# Altium PCB LiPoBattery.PcbDoc
Units mil, origin at the board's own origin, x right, y up, seen from the top; angles counter-clockwise.
Board outline 2500 x 2500 mil, 2 copper layers (Top Layer, Bottom Layer); 22 components, 10 nets, 59 pads, 14 vias.
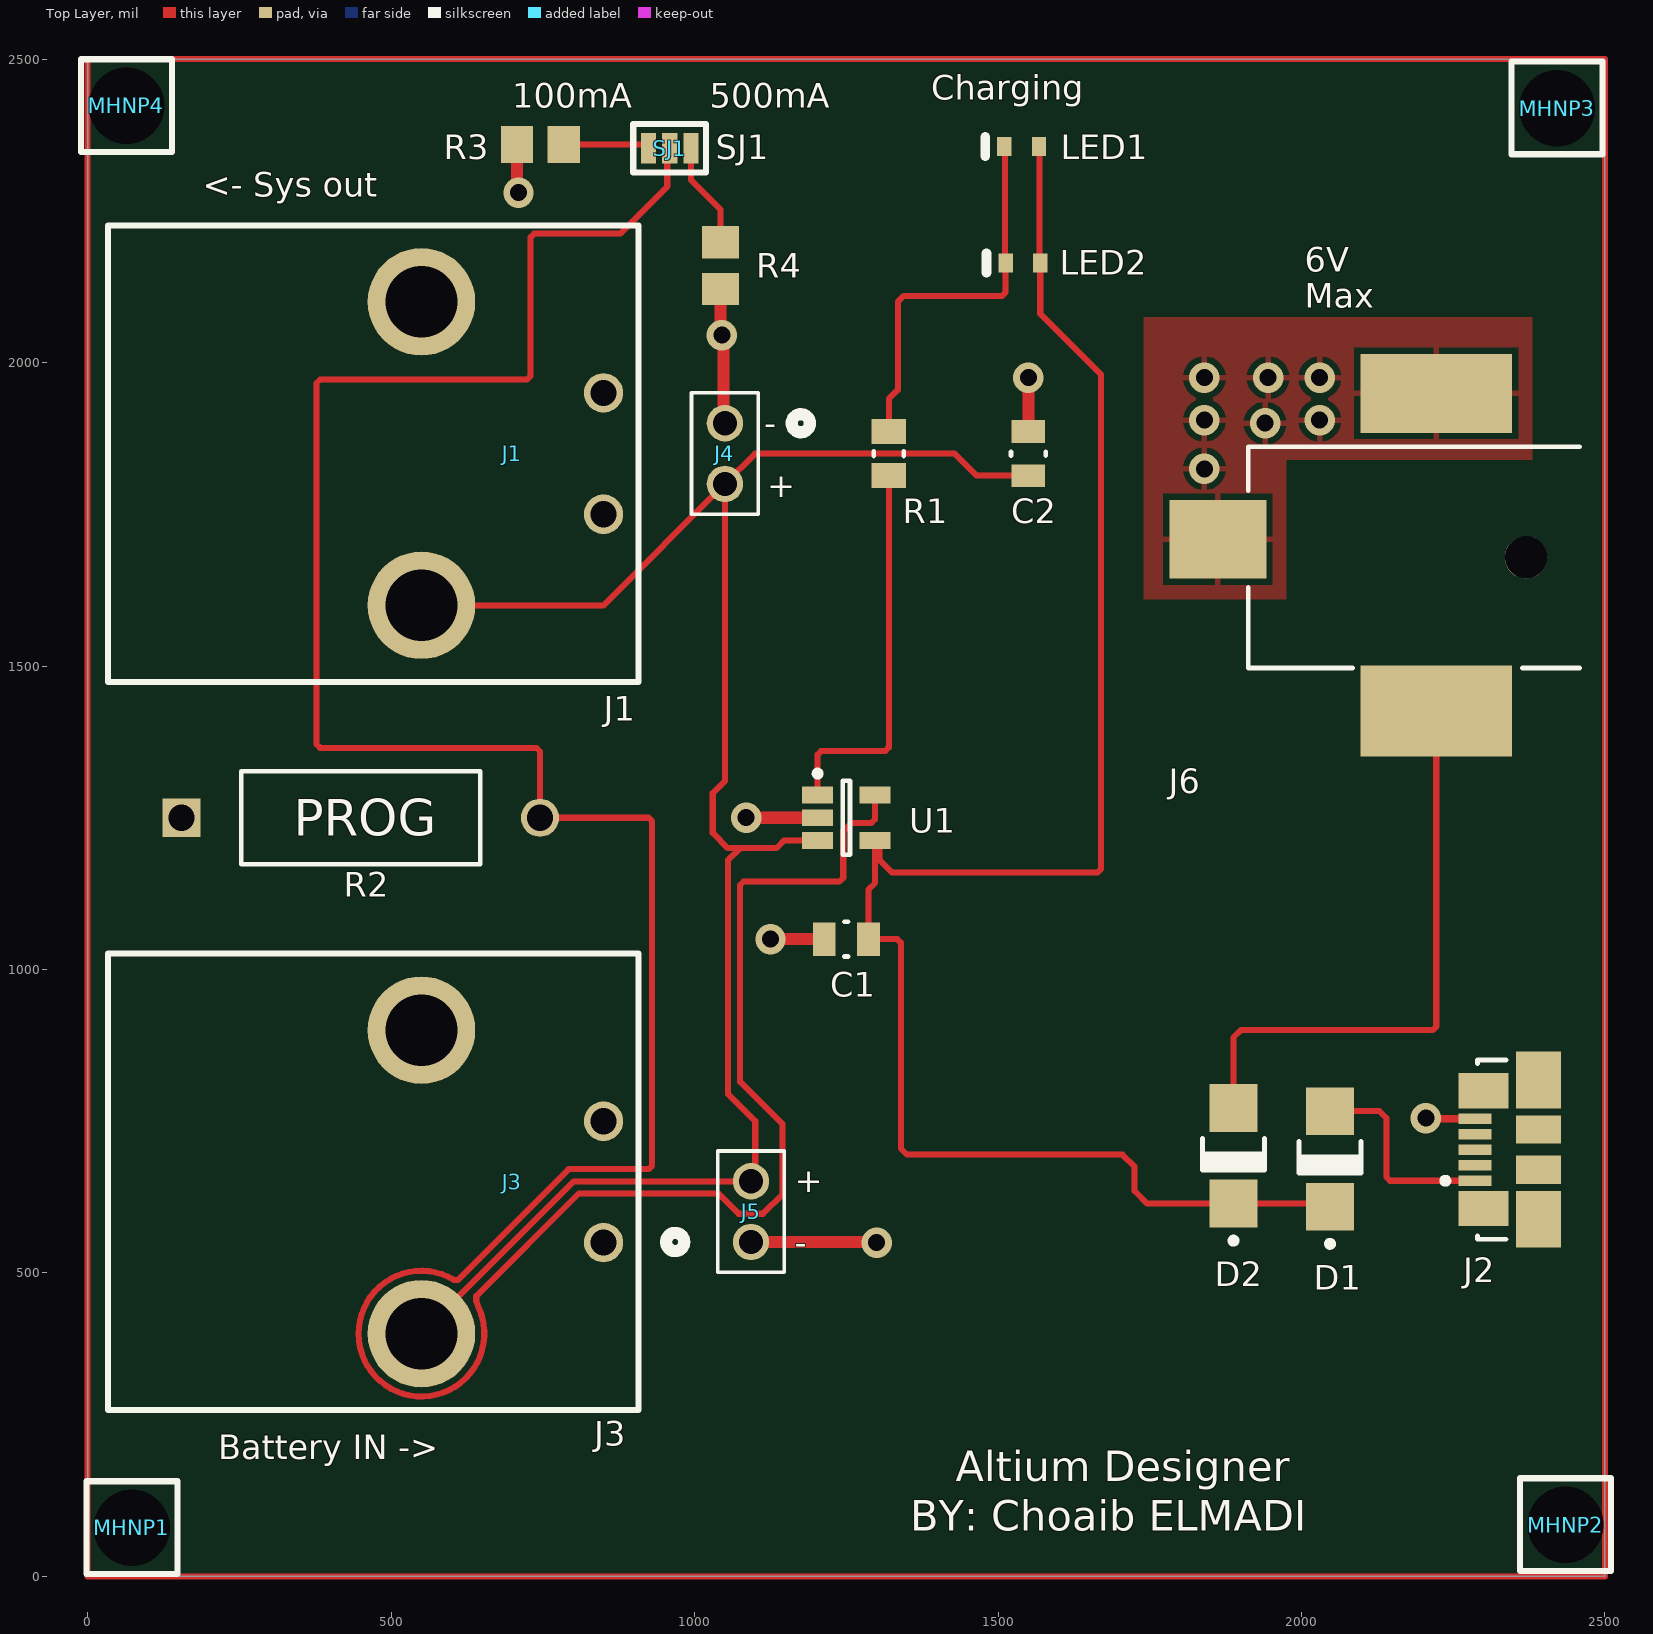
[diagram p0: Top Layer view]
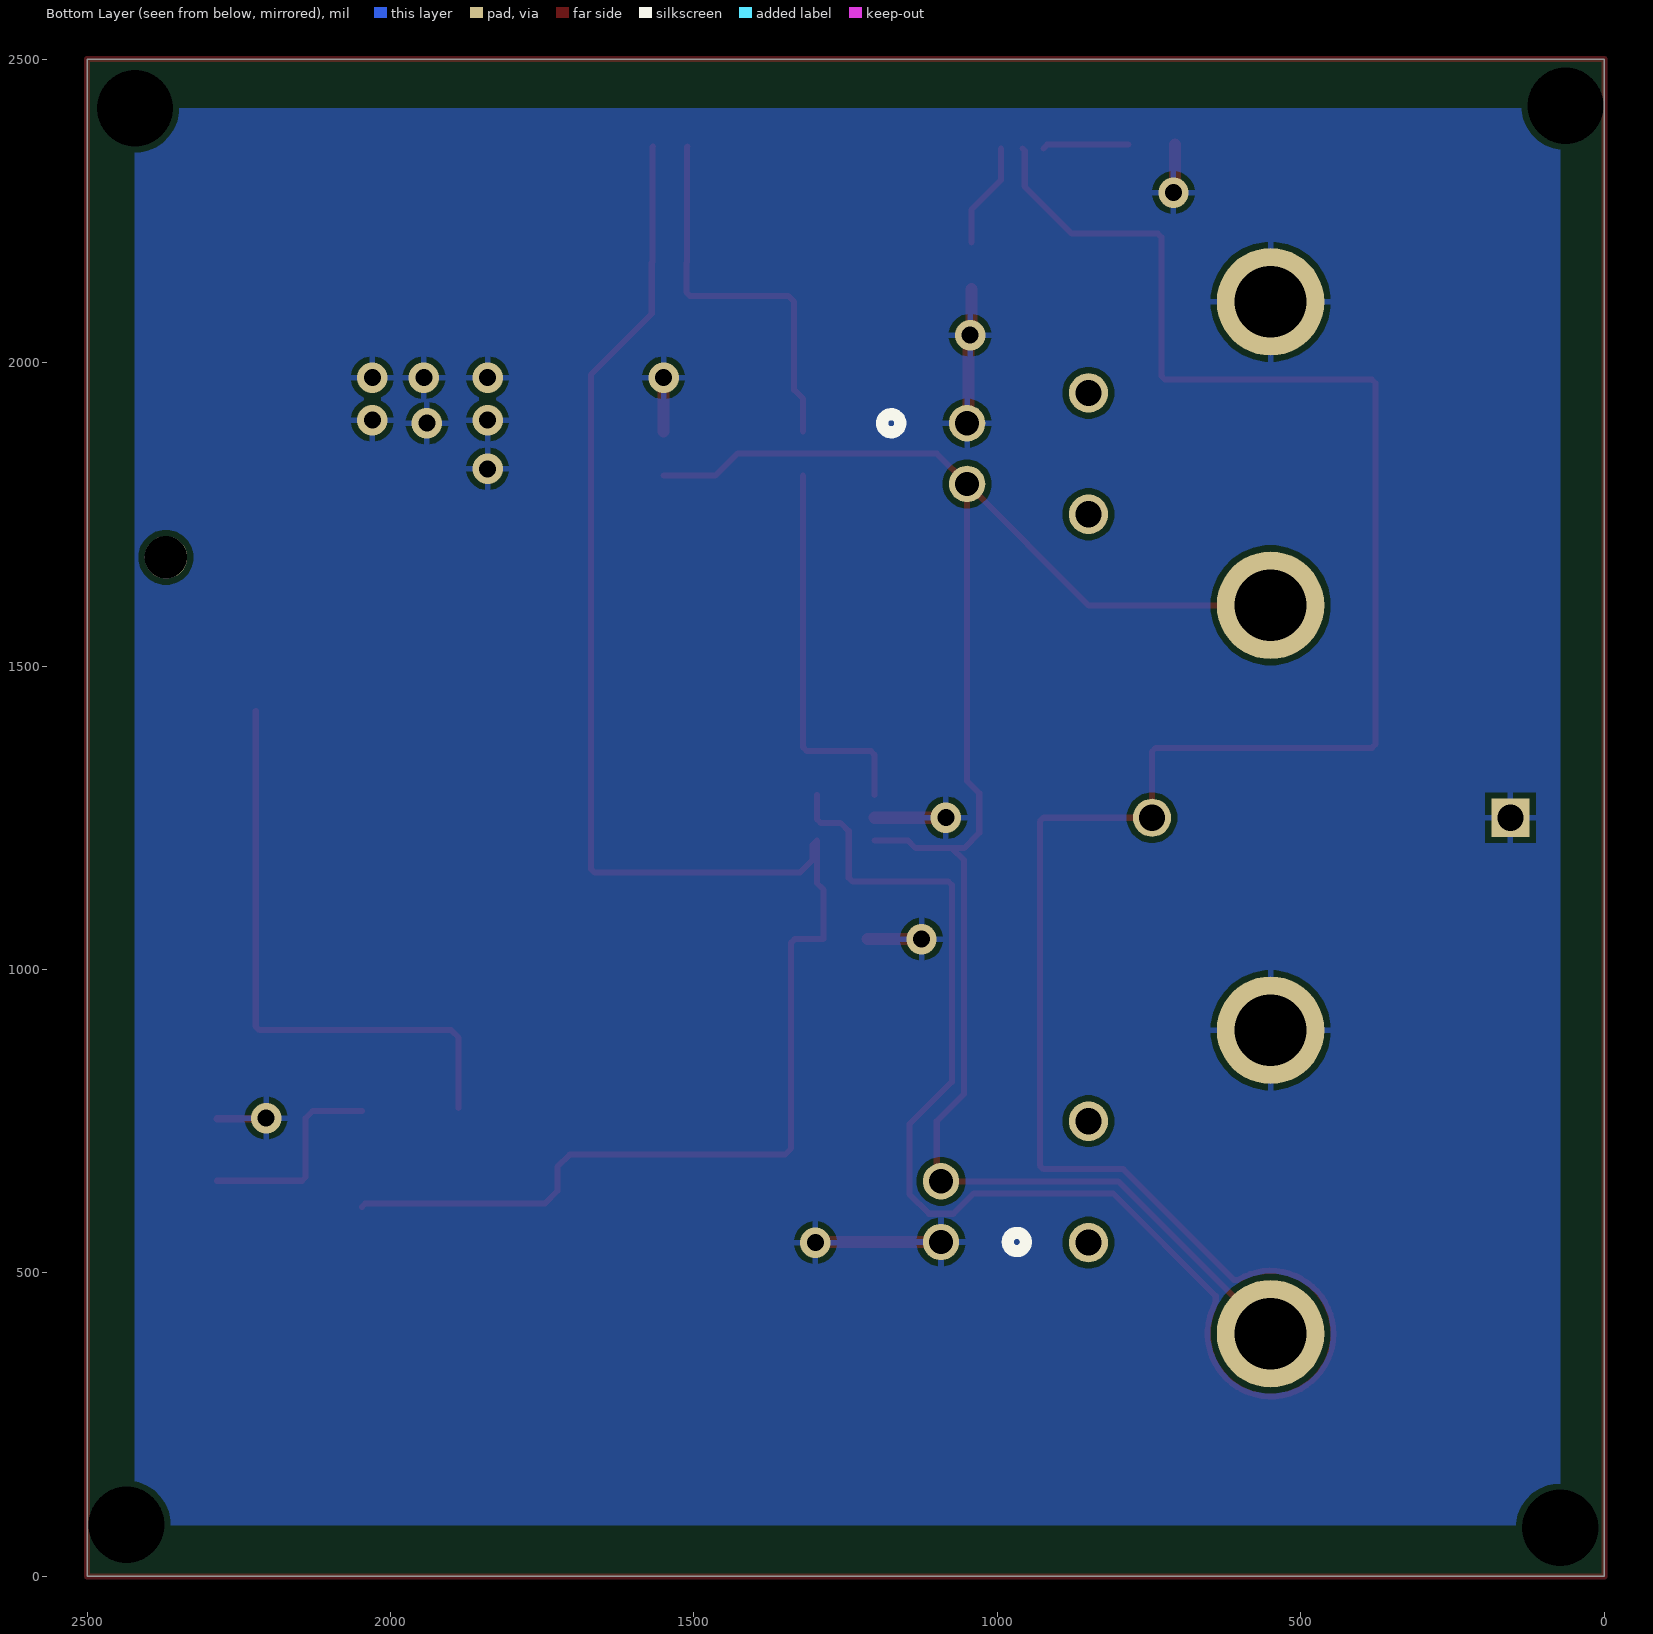
[diagram p1: Bottom Layer view, seen from below]

## Layer stack, top to bottom
Top Solder: solder mask 0.4, Solder Resist, Dk 3.5
Top Layer: signal copper 1.4
Dielectric 1: dielectric 12.6, FR-4, Dk 4.8
Bottom Layer: signal copper 1.4
Bottom Solder: solder mask 0.4, Solder Resist, Dk 3.5

## Board outline
0,0 0,2500 2500,2500 2500,0

## Design rules (kind name [scope] priority, off if disabled: settings)
Clearance [All] p1: gap=10 ignorepadtopadclearanceinfootprint=TRUE
PolygonConnect [All] p1: connectstyle=Relief reliefconductorwidth=10 reliefentries=4 polygonreliefangle="90 Angle" airgapwidth=10
RoutingVias [All] p1: holewidth=28 width=50 viastyle="Through Hole" minholewidth=28 minwidth=50 maxholewidth=28 maxwidth=50
SolderMaskExpansion [All] p1: expansion=4 istentingtop=FALSE
Width [All] p1: maxlimit=40 minlimit=10 preferedwidth=10
30 further rules are at their usual default settings.

## Components (designator, comment, footprint, x,y, rotation, side; value= is the part's Value field where it differs from the comment)
C1 "4.7uF" FP-CC0805-0_85-MFG 1250,1050 r180 top value="4.7 uF"
C2 "4.7uF" FP-CC0805-0_85-MFG 1550,1850 r90 top value="4.7 uF"
D1 "40V, 1A" ONSC-SMA-2-403D-02_V 2047,687.74 r90 top
D2 "40V, 1A" ONSC-SMA-2-403D-02_V 1888,693 r90 top
J1 "CONN HEADER R/A 2POS 5.08MM" 1-179276-2 550,2100 r270 top locked
J2 "47346-0001" MOLX-47346-0001-5_V 2382.68,703.05 r90 top locked
J3 "CONN HEADER R/A 2POS 5.08MM" 1-179276-2 550,900 r270 top locked
J4 "2 POS VERT HEADER 0.100\"" 2Pins_AMP 1050,1900 r180 top
J5 "2 POS VERT HEADER 0.100\"" 2Pins_AMP 1093,551 r0 top
J6 "CONN PWR JACK 2.1X5.5MM SOLDER" FP-RASM722PTR13X-MFG 2202.68,1679 r90 top locked
LED1 "RED" VISH-TLMS1000_V 1539,2356 r180 top
LED2 "RED" VISH-TLMS1000_V 1541,2164 r180 top
MHNP1 "Mounting Hole Non-Plated 3.2mm" MTHNP3P2MM 73,80 r90 top locked
MHNP2 "Mounting Hole Non-Plated 3.2mm" MTHNP3P2MM 2435,85 r90 top locked
MHNP3 "Mounting Hole Non-Plated 3.2mm" MTHNP3P2MM 2421,2419 r90 top locked
MHNP4 "Mounting Hole Non-Plated 3.2mm" MTHNP3P2MM 64,2423 r90 top locked
R1 "330" RESC2013X50X30NL20T20 1320,1850 r270 top
R2 "PROG" VISH-A1-2_V2 450,1250 r0 top locked
R3 "2k" RESC2013X70X40ML20T20 746,2359 r180 top
R4 "10k" RESC2013X70X40ML20T20 1043,2159.61 r90 top
SJ1 "SJUMPER3POS" SJUMPER3POS-Footprint-1 959,2353 r0 top
U1 "Charge Management Controller" SOT-23-OT5_M 1250,1250 r0 top

## Footprints (in the part's own frame and the unit in brackets; to place one, negate y for a bottom-side part, rotate by r counter-clockwise, add the part's x,y. Pads: shape width x height; smd on the part's side, far side on the other; paste and mask are expansions set on the pad)
1-179276-2 [mm]
  round 4.5 hole 3: 1(0,0) 2(12.7,0)
  round 1.65 hole 1.1: ""(3.81,7.62) ""(8.89,7.62)
  silkscreen extent -3.2,-13.13 15.9,9.08, body extent -3.02,-13.55 16.06,8.55, height 10.86
2Pins_AMP [mil]
  round 60 hole 40 mask+0: 1(0,0) 2(0,100)
  silkscreen extent -140,-50 55,150, body extent 0,0 10,10, height 10
FP-CC0805-0_85-MFG [mm]
  rect 0.95x1.4 smd paste+0 mask+0: 1(-0.925,0) 2(0.925,0)
  silkscreen extent -0.08,-0.72 0.08,0.72, body extent -1.6,-1.05 1.6,1.05, height 0.25
FP-RASM722PTR13X-MFG [mm]
  rect 3.3x4.06 smd paste+0 mask+0: 1(0.76,8.65)
  rect 3.81x6.35 smd paste+0 mask+0: 2(-6.43,-0.49)
  rect 3.3x6.35 smd paste+0 mask+0: 3(6.86,-0.49)
  round 1.78 hole 1.78 unplated paste-2539.97 mask+0: ""(0,-4.25)
  silkscreen extent -4.63,-6.5 4.63,7.38, body extent -8.43,-7.48 8.61,10.78, height 0.25
MOLX-47346-0001-5_V [mm] "SMD, 5-Leads, Body 7.5x5mm, Pitch 0.65mm"
  rect 0.45x1.38 smd: 1(-1.3,2.46) 2(-0.65,2.46) 3(0,2.46) 4(0.65,2.46) 5(1.3,2.46)
  rect 1.475x2.1 smd: 6(-2.462,2.1) 7(2.462,2.1)
  rect 2.375x1.9 smd: 8(-2.913,-0.2) 11(2.913,-0.2)
  rect 1.175x1.9 smd: 9(-0.837,-0.2) 10(0.837,-0.2)
  silkscreen extent -3.75,1.16 3.75,3.82, body extent -3.99,-2.78 3.99,2.65, height 2.69
MTHNP3P2MM [mm]
  round 1 hole 3.2: ""(0,0)
  silkscreen extent -1.92,-1.9 1.95,1.9
ONSC-SMA-2-403D-02_V [mm]
  rect 2x2 smd: 1(-2,0) 2(2,0)
  silkscreen extent -3.67,-1.3 0.74,1.3, body extent -2.16,-1.3 2.16,1.3, height 2.2
RESC2013X50X30NL20T20 [mm]
  rect 1.05x1.45 smd: 1(-0.925,0) 2(0.925,0)
  silkscreen extent -0.1,-0.63 0.1,0.63, body extent -1.1,-0.72 1.1,0.72, height 0.5
RESC2013X70X40ML20T20 [mm]
  rect 1.35x1.55 smd: 1(-0.975,0) 2(0.975,0)
  body extent -1.1,-0.72 1.1,0.72, height 0.7
SJUMPER3POS-Footprint-1 [mil]
  rect 25x50 smd: 1(-35,0) 2(0,0) 3(35,0)
  silkscreen extent -60,-40 60,40
SOT-23-OT5_M [mm]
  rect 1.3x0.7 smd: 1(-1.2,0.95) 2(-1.2,0) 3(-1.2,-0.95) 4(1.2,-0.95) 5(1.2,0.95)
  silkscreen extent -1.32,-1.55 0.15,1.97, body extent -0.9,-1.55 0.9,1.55, height 1.45
VISH-A1-2_V2 [mm]
  rect 1.6x1.6 hole 1.1: 1(-7.5,0)
  round 1.6 hole 1.1: 2(7.5,0)
  silkscreen extent -5,-1.95 5,1.95, body extent -7.91,-1.95 7.92,1.95, height 3.88
VISH-TLMS1000_V [mm]
  rect 0.6x0.8 smd: 1(-0.725,0) 2(0.725,0)
  silkscreen extent 1.52,-0.4 1.52,0.4, body extent -0.8,-0.4 0.8,0.4, height 0.65

## Part data
C1 C2: library part "CAP CER 4.7UF 6.3V X7R 0805", "4.7µF ±10% 6.3V Ceramic Capacitor X7R 0805 (2012 Metric)", Capacitance="4.7 uF", Manufacturer=Yageo, Manufacturer Part Number=CC0805KKX7R5BB475, Package=CC0805-0.85, Supplier Part Number 1=311-3419-1-ND, Temperature="-30°C to +85°C", Temperature Characteristic=X7R, Temperature Range High=+85°C, Temperature Range Low=-30°C, Tolerance=0.1, Voltage Rating="6.3 V", Automotive=No, Category=Cap, ComponentLink2Description=Datasheet, ComponentLink2URL=http://www.yageo.com/documents/recent/UPY-GPHC_Y5V_6.3V-to-50V_8.pdf, Device Class L1="Passive Components", Device Class L2=Capacitors, Device Class L3="Ceramic Capacitors", Digikey Description="CAP CER 4.7UF 6.3V X7R 0805", Footprint Url=http://www.yageo.com/exep/pages/download/literatures/UPY-C_GEN_24.pdf, Height=0.95mm, Ipc Land Pattern Name=CAPC200125X85, Lead Free=Yes, Material=Ceramic, Mouser Description="Multilayer Ceramic Capacitors MLCC - SMD/SMT 4.7uF 6.3V X7R 10%", Octopart=https://octopart.com/cc0805kkx7r5bb475-yageo-27548069, RoHS=TRUE, Supplier 1=Digi-Key
D1 D2: library part "DIODE SCHOTTKY 40V 1A SMA", "Schottky Power Rectifier, 2-Pin SMA, Pb-Free, Cut Tape, Diode Schottky 40V 1A Surface Mount SMA", Manufacturer="ON Semiconductor", Manufacturer Part Number=MBRA140T3G, Supplier Part Number 1=MBRA140T3GOSCT-ND, ComponentLink1Description="Manufacturer URL", ComponentLink1URL=http://www.onsemi.com/, ComponentLink2Description=Datasheet, ComponentLink2URL=http://www.onsemi.cn/pub_link/Collateral/MBRA140T3-D.PDF, ComponentLink3Description="Package Specification", ComponentLink3URL=http://www.onsemi.com/pub_link/Collateral/403D-02.PDF, Configuration=Single, DatasheetVersion="Rev. 10", IFSM Max (A)=30, Mounting Technology="Surface Mount", PackageDescription="2-Pin Small Molded Package, J-Bend Lead, Body 2.605 x 4.315 mm", PackageReference=SMA-2-403D-02, PackageVersion="Rev. G, 07/2012", Packing="Tape and Reel", PartNumber=MBRA140T3G, RoHS=TRUE, Supplier 1=Digi-Key
J1 J3: "Connector Header Through Hole, Right Angle 2 position 0.200\" (5.08mm)", Manufacturer="TE Connectivity AMP Connectors", Manufacturer Part Number=1-179276-2, Supplier Part Number 1=A29545-ND, ComponentLink1Description="Product URL", ComponentLink1URL=https://www.te.com/usa-en/product-1-179276-2.html?te_bu=Cor&te_type=other&te_campaign=oct_glo_manufacturer&elqCampaignId=26136, Supplier 1=Digi-Key
J2: library part "CONN RCPT USB2.0 MICRO B SMD R/A", "Micro-USB B Receptacle with Flange, -30 to 85 degC, 5-Pin SMD, RoHS, Tape and Reel", Color=Black, Manufacturer=Molex, Maximum Current Rating=1.8/ContactA, Maximum Voltage Rating=30VAC, Operating Temperature=-30to85C, Supplier Part Number 1=WM17141CT-ND, Body Orientation=RightAngle, Contact Material=CopperAlloy, Contact Plating=GoldOverPalladiumNickelOverNickel, Datasheet URL=https://datasheet.ciiva.com/30075/304740473460001-io-nectors-30075527.pdf, Datasheet Version=Dec-13, Dimension=7.8x5.43x2.94mm, Gender=RCP, Housing Material=LiquidCrystalPolymer, Manufacturer Part Number=47346-0001, Manufacturer URL=http://www.molex.com/, Mounting=SurfaceMount, Number of Contacts=5, Number of Ports=1, Number of Terminals=5, Packaging=EmbossedTapeandReel, Pitch=0.65mm, RoHS=Yes, Supplier 1=Digi-Key, Termination Method=Solder, Type=MicroUSBTypeB
J4 J5: library part "CONN HEADER VERT 2POS 0.100\"", "Connector Header Through Hole 2 position", Manufacturer="Amphenol ICC (FCI)", Manufacturer Part Number=67997-402HLF, Supplier Part Number 1=609-5502-ND, Built_By=EMA_UL_Team, Copyright="Copyright (C) 2018 Accelerated Designs. All rights reserved", RefDes=RefDes, SourceLibrary=Amphenol_2013-08-06_Bergstik_2Row_67997, Supplier 1=Digi-Key
J6: "Power Barrel Connector Jack 2.10mm ID (0.083\"), 5.50mm OD (0.217\") Surface Mount, Right Angle", Case/Package=SMD/SMT, Color=Black, Current Rating=5A, Manufacturer=Switchcraft, Manufacturer Part Number=RASM722PTR13X, Package Quantity=120, Supplier Part Number 1=SC2028-1-ND, Connector Type=Jack, Contact Material="Copper Alloy", Contact Plating=Tin, Gender=Male, Housing Color=Black, Housing Material=Thermoplastic, Mount="Surface Mount", Shielding=Unshielded, Supplier 1=Digi-Key, Termination=Solder
LED1 LED2: library part "LED RED 0603 SMD", "Low Current LED, 40 mW, 1.8 V, -40 to 100 degC, 2-Pin SMD (0603), RoHS, Tape and Reel", Forward Current If=2mA, Forward Voltage=1.8V, LED Colour=Red, Manufacturer=Vishay, Manufacturer Part Number=TLMS1000-GS08, Package Description="2-Pin Surface Mount Device, Body 1.6 x 0.8 mm", Package Reference=TLMS1000, Supplier Part Number 1=TLMS1000-GS08CT-ND, Automotive Qualification Standard=AEC-Q100, Bulb Size=1.6mmx0.8mm, Datasheet URL=https://datasheet.ciiva.com/5798/1698881-5798337.pdf, Datasheet Version="Rev. 1.7, 02/2011", LED Mounting=SMD, Lens Shape=Rectangular, Luminous Intensity=4mcd, Manufacturer URL=http://www.vishay.com/, Mounting Technology=SurfaceMount, MSL=MSL2-1year, Packaging=CutTape, Product Range=-, Supplier 1=Digi-Key, SVHC=ToBeAdvised, Viewing Angle=80°, Wavelength Typ=636nm
MHNP1 MHNP2 MHNP3 MHNP4: library part MTHNP3P2MM, "Mounting Hole Non-Plated 3.2 mm drill hole", Manufacturer=N/A, Manufacturer Part Number=N/A
R1: library part "RES SMD 330 OHM 1% 1/8W 0805", "330 Ohms ±1% 0.125W, 1/8W Chip Resistor 0805 (2012 Metric) Automotive AEC-Q200 Thick Film", Manufacturer=Vishay, Manufacturer Part Number=CRCW0805330RFKEA, Supplier Part Number 1=541-330CCT-ND, Supplier 1=Digi-Key
R2: library part "RES 62K OHM 2W 5% AXIAL", "Power Metal Film Leaded Resistor, 62 KOhm +/-5%, 2 W, 2-Pin THD, RoHS, Ammo Pack62 kOhms ±5% 2W Through Hole Resistor Axial Automotive AEC-Q200, Flame Retardant Coating, Safety Metal Film", Manufacturer="Vishay Semiconductor", Manufacturer Part Number=PR02000206202JR500, PartNumber=PR02000206202JA100, Power="2 W", Resistance="62 KOhm", Supplier Part Number 1=PPC62KW-2CT-ND, Temperature Coefficient="+/-250 ppm/degC", Tolerance=+/-5%, ComponentLink1Description="Manufacturer URL", ComponentLink1URL=http://www.vishay.com/, ComponentLink2Description=Datasheet, ComponentLink2URL=http://www.vishay.com/docs/28729/28729.pdf, ComponentLink3Description="Package Specification", ComponentLink3URL=http://www.vishay.com/docs/28729/28729.pdf, DatasheetVersion=Jun-13, Mounting Technology="Through Hole", PackageDescription="2-Pin Axial Lead, Body 10 x 3.9 mm", Packing="Ammo Pack", RoHS=TRUE, Supplier 1=Digi-Key
R3: library part "RES SMD 2K OHM 5% 1/8W 0805", "2 kOhms ±5% 0.125W, 1/8W Chip Resistor 0805 (2012 Metric) Automotive AEC-Q200 Thick Film", Manufacturer=Panasonic, Manufacturer Part Number=ERJ-6GEYJ202V, Supplier Part Number 1=P2.0KACT-ND, Supplier 1=Digi-Key
R4: library part "RES SMD 10K OHM 1% 1/8W 0805", "10 kOhms ±1% 0.125W, 1/8W Chip Resistor 0805 (2012 Metric) Automotive AEC-Q200 Thick Film", Manufacturer=Panasonic, Manufacturer Part Number=ERJ-6ENF1002V, Supplier Part Number 1=P10.0KCCT-ND, Supplier 1=Digi-Key
SJ1: "Solder jumper 3 pads and pins", Manufacturer=N/A, Component Type=Miscellaneous, Manufacturer Part Number=N/A, Pins=3
U1: library part "IC LI-ION/LI-POLY CTRLR SOT23-5", "Simple, Miniature Single-Cell, Fully Integrated Li-Ion/Li-Polymer Charge Management Controller, 4.2V, 5-Pin SOT-23, Industrial Temperature, Cut Tape", Manufacturer=Microchip, Manufacturer Part Number=MCP73811T-420I/OT, Supplier Part Number 1=MCP73811T-420I/OTCT-ND, Code_IPC=SOT23-5, DatasheetVersion="revB, Sep-2007", PackageDescription="5-Lead Plastic Small Outline Transistor (OT) [SOT-23]", PackageReference=SOT-23-OT5, PackageVersion="revBB, Aug-2009", Supplier 1=Digi-Key

## Via types
v1: diameter 50, hole 28, Top Layer to Bottom Layer, 14 vias

## Nets (pads, with @x,y where several pads share a name; then routed paths per layer and width w, separated by ;. In a path a pad name is that pad's centre, name@x,y a point inside that pad or via, vN(x,y) a via of type N, cw(c..) or ccw(c..) an arc to the next point about the centre after c; other vN are vias at no path point)
GND: C1.2 C2.2 J1.1 J2.5 J3.1 J4.1 J5.1 J6.1 J6.3 R2.1 R3.2 R4.1 U1.2 | length 887.6
  Top Layer w10: v1@707.61,2282.39 v1(710,2280) ; v1@1043,2052 1045,2050 v1(1045,2045) ; v1@1299,551 v1(1300,550)
  Top Layer w12: v1@2205.77,754.23 J2.5
  Top Layer w20: v1@707.61,2282.39 R3.2 ; v1@1043,2052 R4.1 ; v1(1045,2045) 1047.5,2042.5 1047.5,1902.5 J4.1 ; v1(1085,1250) U1.2 ; J5.1 v1@1299,551 ; v1(1125,1050) C1.2 ; C2.2 v1(1550,1975) ; v1(2205,755) v1@2205.77,754.23
  other v1: 1840,1825 1940,1900 1840,1905 2030,1905 1840,1975 1945,1975 2030,1975
NetC1_1: C1.1 D1.1 D2.1 LED1.1 LED2.1 U1.4 | length 2976.5
  Top Layer w10: LED1.1 1568.54,2355 1568.54,2165 LED2.1 1569.54,2080.46 1670,1980 1670,1165.86 1664.14,1160 1325,1160 1305,1180 1305,1204.84 U1.4 1297.24,1142.24 1286.42,1131.42 C1.1 1334.14,1050 1340,1044.14 1340,705 1350,695 1705,695 1725,675 1725,635 1745.74,614.26 D2.1 2041.74,614.26 D1.1
NetC2_1: C2.1 J1.2 J3.2 J4.2 J5.2 U1.3 | length 3116
  Top Layer w10: J3.2 801,651 J5.2 1100,658 1100,750 1055,795 1055,1180 1075,1200 ; J1.2 850,1600 J4.2 ; U1.3 1147.6,1212.6 1135,1200 1075,1200 ; C2.1 1464.8,1813.58 1428.38,1850 1100,1850 J4.2 ; J4.2 1050,1310.43 1030,1290.43 1030,1225 1055,1200 1075,1200
NetD1_2: D1.2 J2.1 | length 343.3
  Top Layer w10: D1.2 2128.52,766.48 2140,755 2140,657.73 2145.86,651.87 J2.1
NetD2_2: D2.2 J6.2 | length 977.6
  Top Layer w10: D2.2 1888,888 1900,900 2216.11,900 2221.97,905.86 J6.2
NetLED1_2: LED1.2 LED2.2 R1.1 | length 644.8
  Top Layer w10: R1.1 1320,1940 1335,1955 1335,2100 1345,2110 1506.6,2110 1512.46,2115.86 LED2.2 1511.46,2165 1511.46,2355 LED1.2
NetR1_2: R1.2 U1.1 | length 636.6
  Top Layer w10: U1.1 1202.76,1354.14 1208.61,1360 1314.14,1360 1320,1365.86 R1.2
NetR2_2: R2.2 SJ1.2 U1.5 | length 5247.9
  Top Layer w10: SJ1.2 955,2349 955,2290 877.5,2212.5 735.86,2212.5 730,2206.64 730,1977.98 724.14,1972.12 382.98,1972.12 377.12,1966.26 377.12,1370.86 382.98,1365 739.42,1365 745.28,1359.14 R2.2 924.14,1250 930,1244.14 930,676.86 924.14,671 792.72,671 610.39,488.68 603.53,488.68 ccw(c550,400) 447,389.02 ccw(c538.74,398.79) 447.07,388.42 ccw(c550,400) 646.31,438.13 640.25,453.43 640.25,461.71 641.7,463.16 809.54,631 1039,631 1072.52,597.48 1112.48,597.48 1145,630 1145,745 1075,815 1075,1139.14 1080.86,1145 1239.14,1145 1245,1150.86 1245,1228.02 1258.36,1241.38 1291.39,1241.38 1297.24,1247.24 U1.5
NetR3_1: R3.1 SJ1.1 | length 142.1
  Top Layer w10: R3.1 918,2359 SJ1.1
NetR4_2: R4.2 SJ1.3 | length 175.3
  Top Layer w10: SJ1.3 994,2301 1043,2252 R4.2
pads on no net: J1. J2.2 J2.3 J2.4 J2.6 J2.7 J2.8 J2.9 J2.10 J2.11 J3. J6. MHNP1. MHNP2. MHNP3. MHNP4.
copper on no net: | length 10000
  Top Layer w10: 0,0 0,2500 2500,2500 2500,0 0,0

## Polygon pours and split planes (outlines as drawn)
GND on Bottom Layer "GND" (solid, pour order 1): 68,2419 2421,2419 2421,84 77,84 73,80 73,2414
GND on Top Layer "GND" (solid, pour order 2): 2380,1840 1975,1840 1975,1610 1740,1610 1740,2075 2380,2075

## Silkscreen, mask and mechanical layers (free items; w line width, h text height)
Top Overlay:
  text "Charging" at 1390,2433.33 h40
  text "100mA" at 700,2420 h40
  text "500mA" at 1025,2420 h40
  text "<- Sys out" at 190,2273.33 h40
  text "6V" at 2005,2150 h40
  text "Max" at 2005,2090 h40
  text "-" at 1115,1880.01 h40
  text "+" at 1120,1778.34 h40
  text "PROG" at 340,1220 h60
  text "+" at 1165,633.34 h40
  text "-" at 1165,530.01 h40
  text "Battery IN ->" at 215,193.33 h40
  text "Altium Designer" at 1430,156.66 h50
  text "BY: Choaib ELMADI" at 1355,75 h50

## Text inside footprints (layer, text, board x,y; h text height)
J2: Mechanical 6 "PCB EDGE" at 2451.85,419.59 h11.81 r90
J4: Mechanical 7 "Default Padstyle: EX60Y60D40P" at 1412.5,2105 h50 r180; Mechanical 7 "1st Mtg Padstyle: EX80Y80D50P" at 1412.5,2180 h50 r180; Mechanical 7 "2nd Mtg Padstyle: EX70Y70D70P" at 1412.5,2255 h50 r180; Mechanical 7 "3rd Mtg Padstyle: EX70Y70D70P" at 1412.5,2330 h50 r180; Mechanical 7 "Left Mtg Padstyle: EX60Y60D30P" at 1425,2405 h50 r180; Mechanical 7 "Right Mtg Padstyle: EX60Y60D30P" at 1437.5,2480 h50 r180; Mechanical 7 "Alt Padstyle 1: OX60Y90D30P" at 1387.5,2555 h50 r180; Mechanical 7 "Alt Padstyle 2: OX90Y60D30P" at 1387.5,2630 h50 r180; Mechanical 7 "0.1in/2.54mm" at 1175,1650 h25 r180; Mechanical 7 "0.1in/2.54mm" at 1125,1325 h25 r180; Mechanical 7 "0.1in/2.54mm" at 880,1862.5 h25 r180; Mechanical 7 "0.095in/2.413mm" at 1717.5,1815 h25 r180; Mechanical 7 "0.19in/4.826mm" at 1655,1862.5 h25 r180
J5: Mechanical 7 "Default Padstyle: EX60Y60D40P" at 730.5,346 h50; Mechanical 7 "1st Mtg Padstyle: EX80Y80D50P" at 730.5,271 h50; Mechanical 7 "2nd Mtg Padstyle: EX70Y70D70P" at 730.5,196 h50; Mechanical 7 "3rd Mtg Padstyle: EX70Y70D70P" at 730.5,121 h50; Mechanical 7 "Left Mtg Padstyle: EX60Y60D30P" at 718,46 h50; Mechanical 7 "Right Mtg Padstyle: EX60Y60D30P" at 705.5,-29 h50; Mechanical 7 "Alt Padstyle 1: OX60Y90D30P" at 755.5,-104 h50; Mechanical 7 "Alt Padstyle 2: OX90Y60D30P" at 755.5,-179 h50; Mechanical 7 "0.1in/2.54mm" at 968,801 h25; Mechanical 7 "0.1in/2.54mm" at 1018,1126 h25; Mechanical 7 "0.1in/2.54mm" at 1263,588.5 h25; Mechanical 7 "0.095in/2.413mm" at 425.5,636 h25; Mechanical 7 "0.19in/4.826mm" at 488,588.5 h25